# Altium PCB PCB1_r2.PcbDoc (part 1 of 3)
Units mm, origin at the board's own origin, x right, y up, seen from the top; angles counter-clockwise.
Board outline 305 x 172.5 mm, 4 copper layers (Top Layer, GND, VDD, Bottom Layer), stack 1.585 mm thick; 217 components, 137 nets, 764 pads, 352 vias.
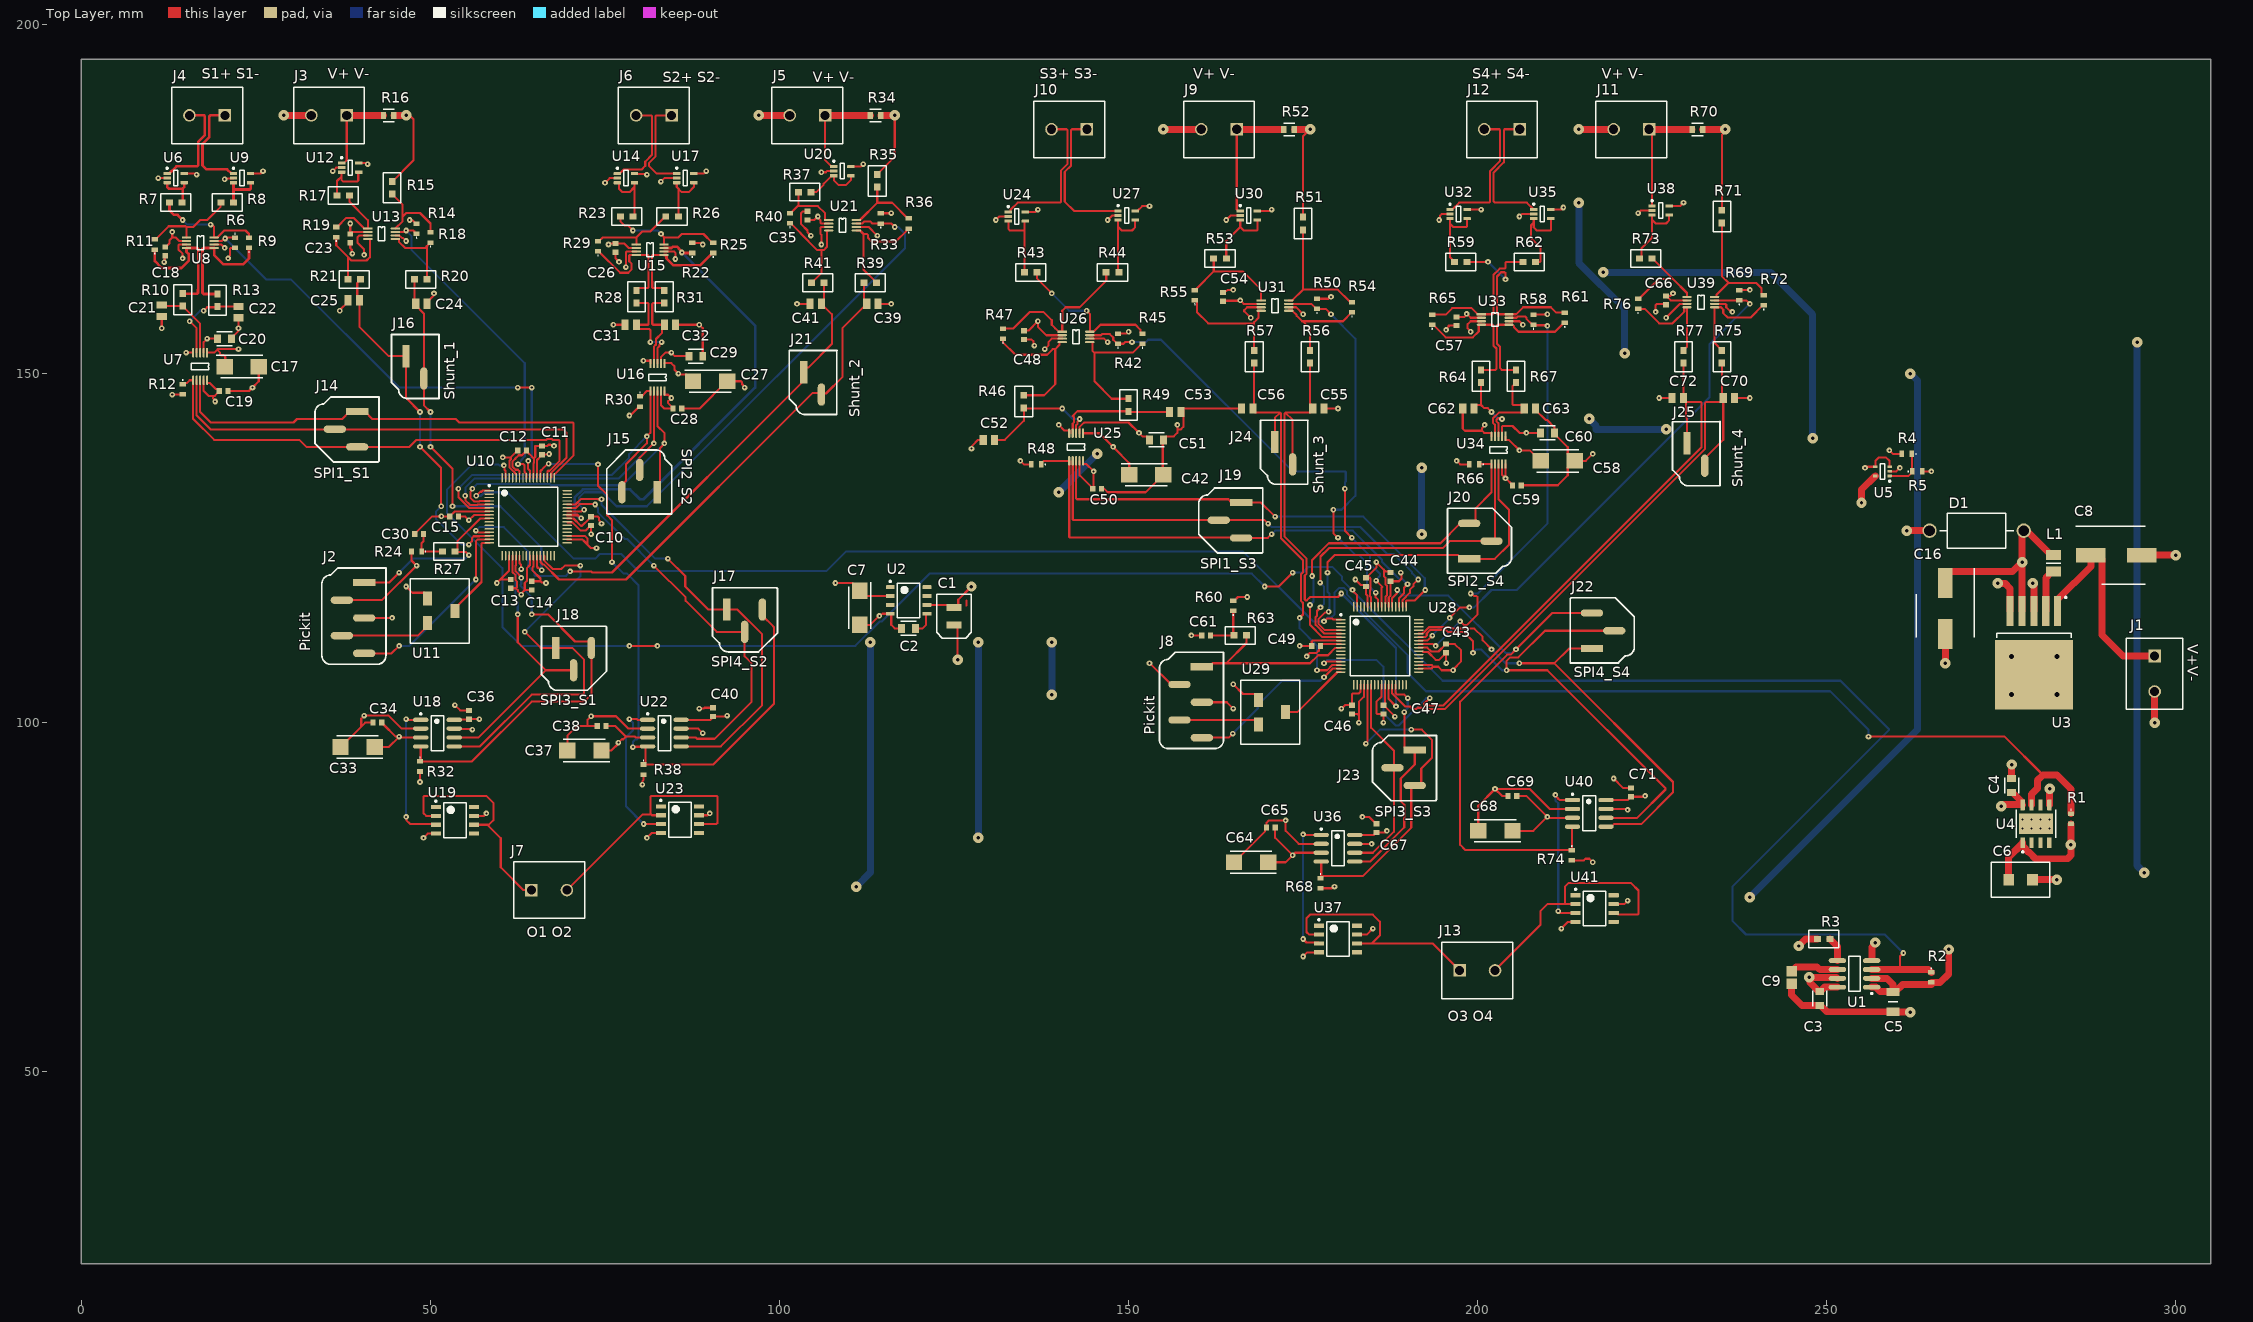
[diagram p0: Top Layer view]
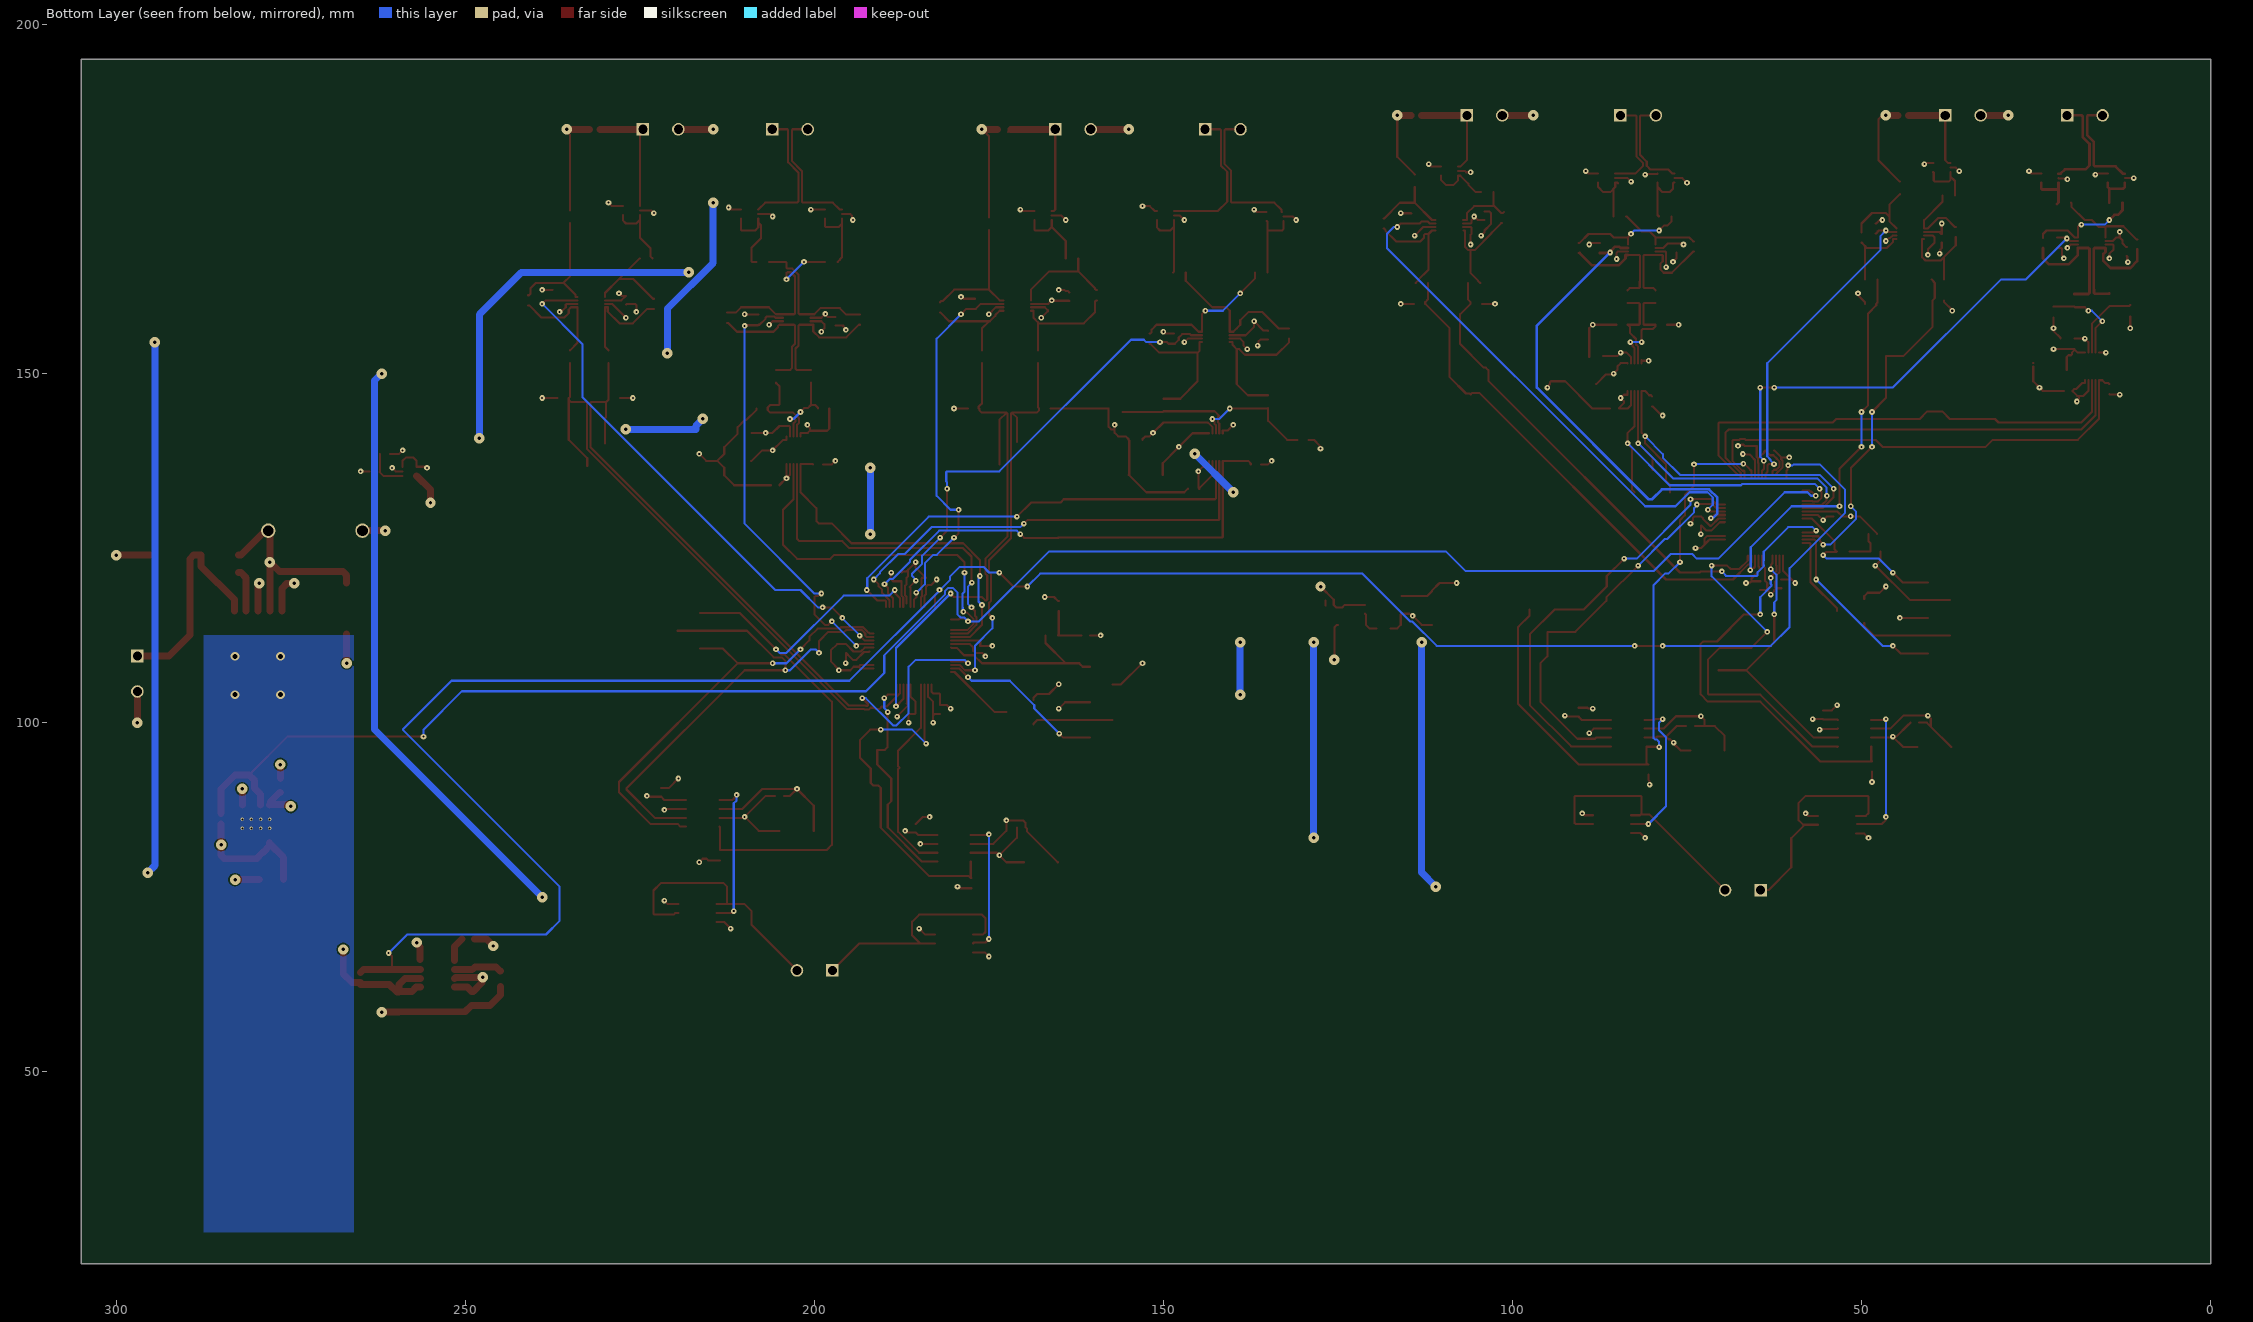
[diagram p1: Bottom Layer view, seen from below]
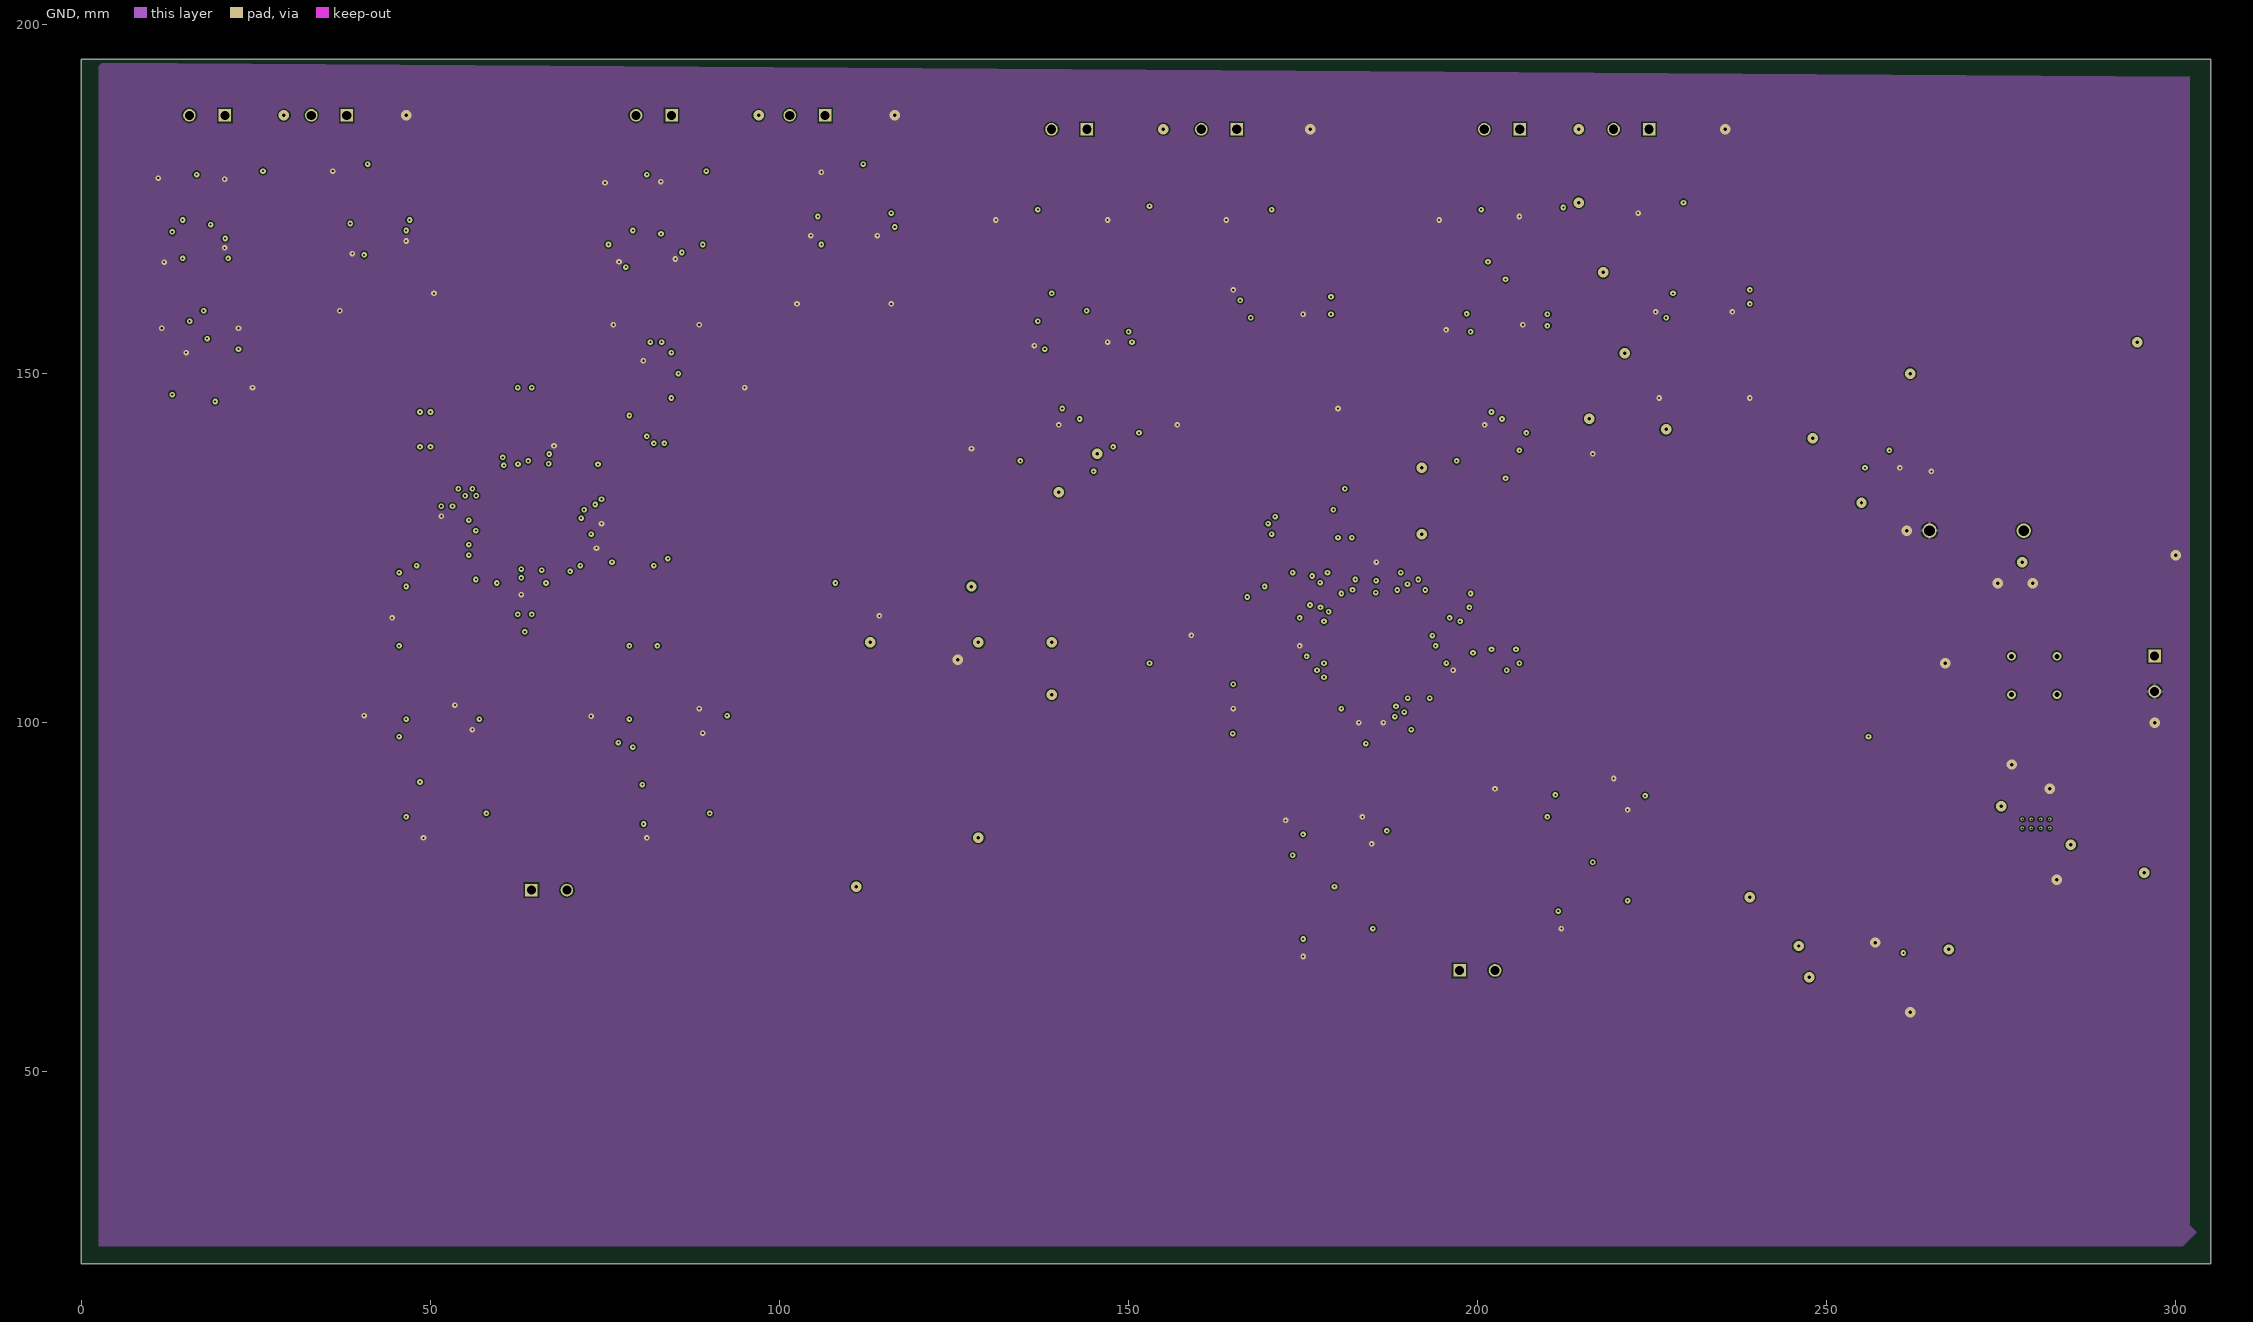
[diagram p2: GND]
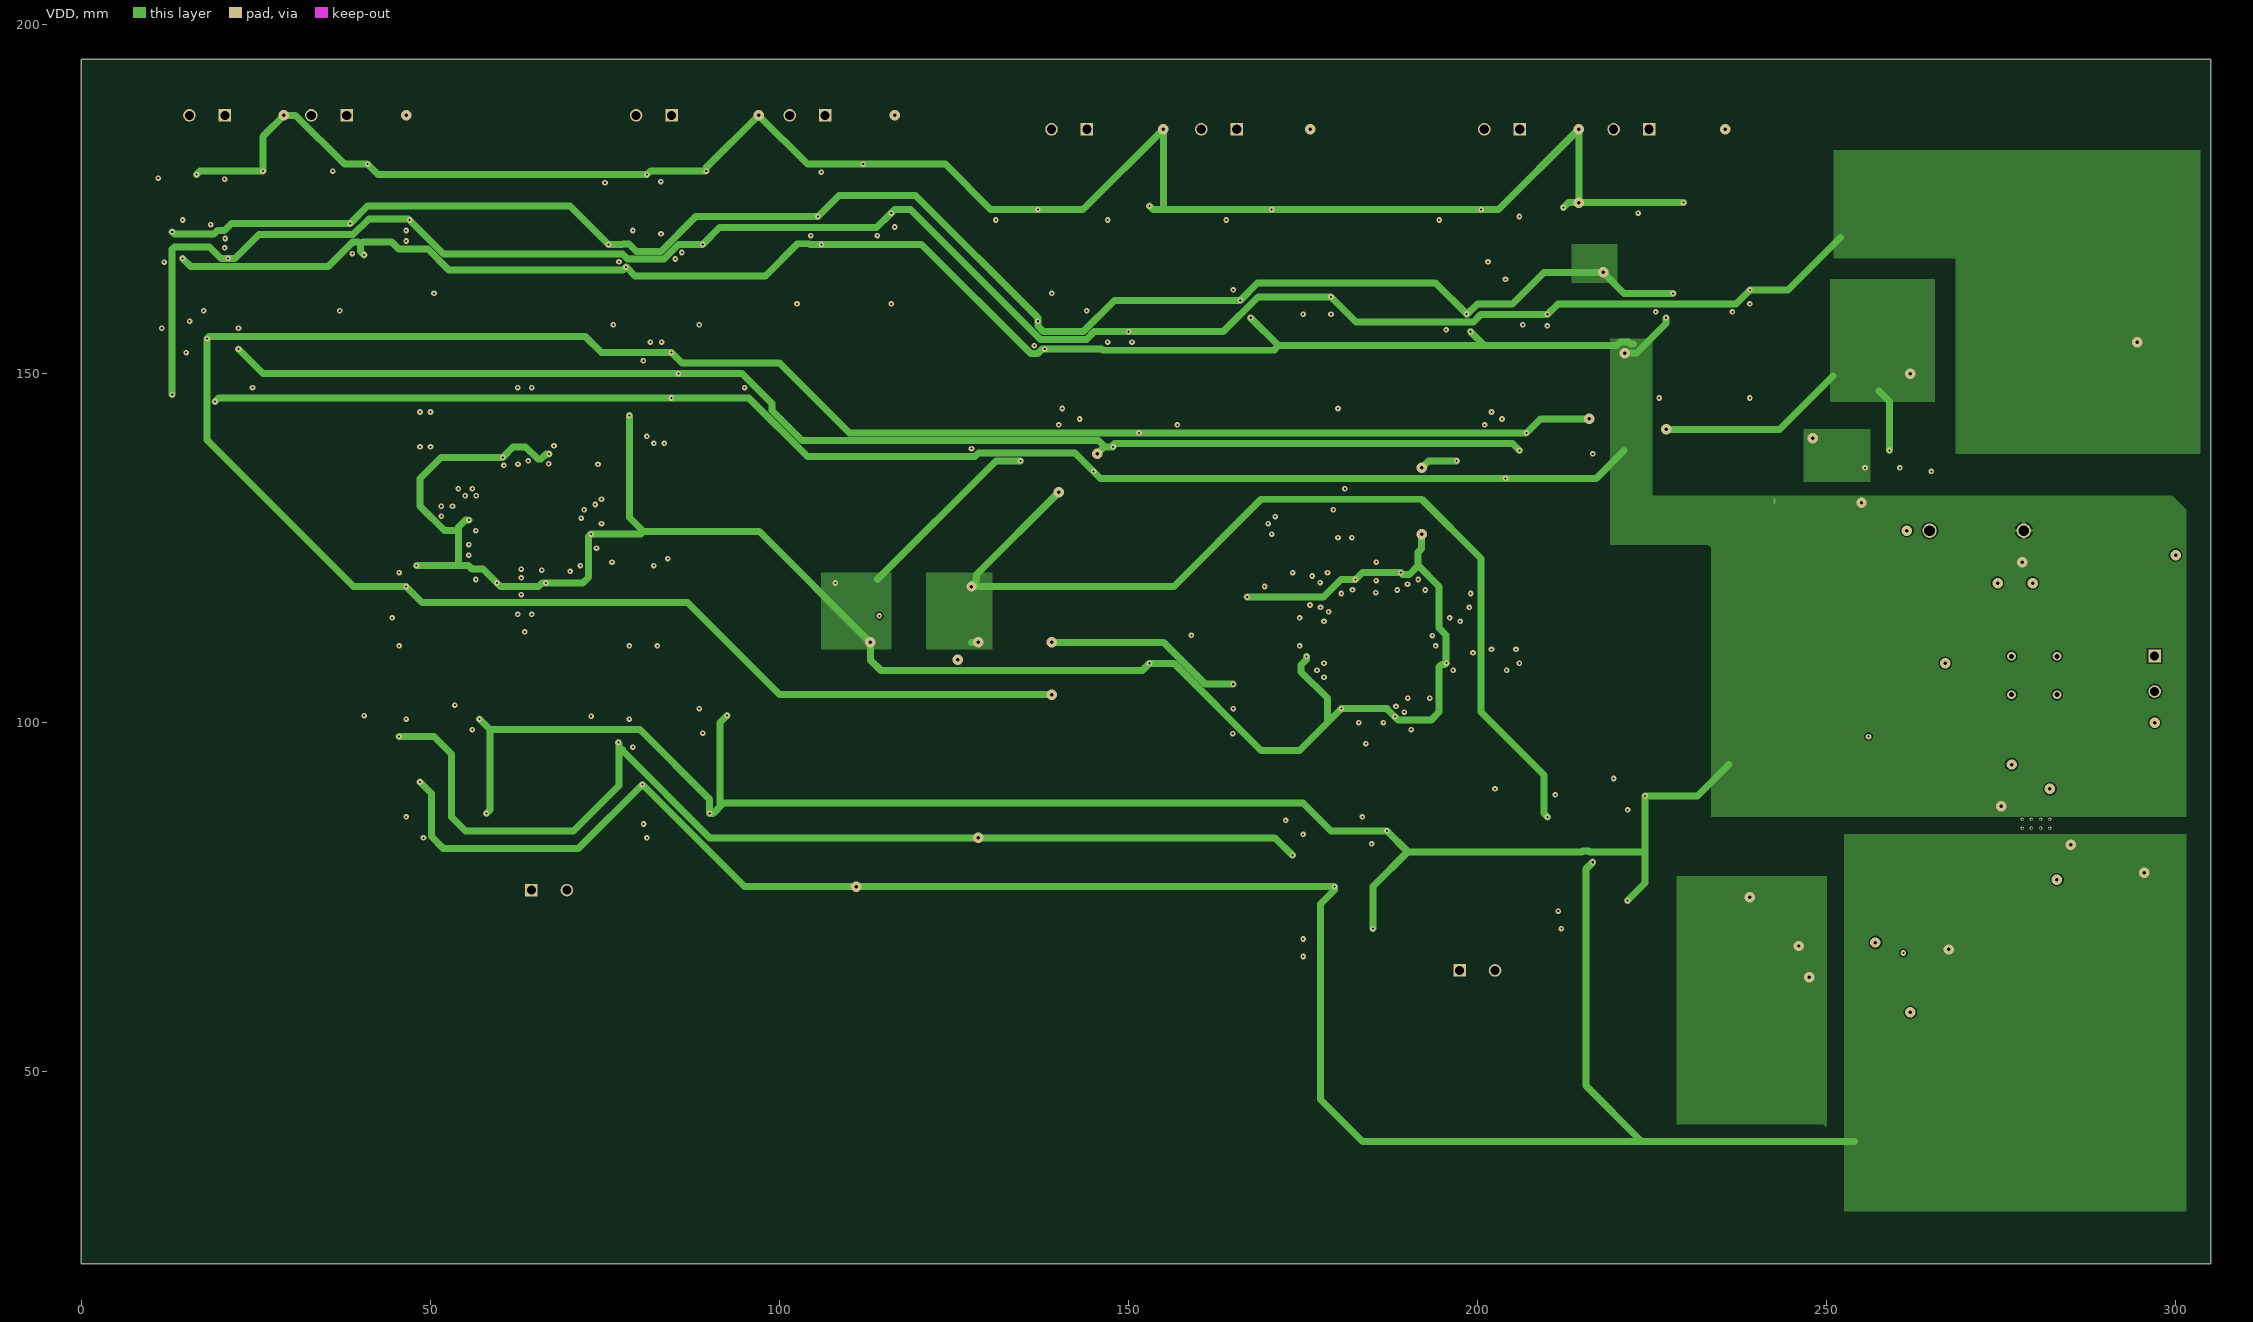
[diagram p3: VDD]

## Layer stack, top to bottom
Top Solder: solder mask 0.0102, Solder Resist, Dk 3.5
Top Layer: signal copper 0.035
Dielectric 2: prepreg 0.21, PP-006, Dk 4.1
GND: signal copper 0.0152
Dielectric 1: dielectric 1.065, FR-4, Dk 4.8
VDD: signal copper 0.0152
Dielectric 3: prepreg 0.21, PP-006, Dk 4.1
Bottom Layer: signal copper 0.035
Bottom Solder: solder mask 0.0102, Solder Resist, Dk 3.5

## Board outline
0,22.5 0,195 305,195 305,22.5

## Design rules (kind name [scope] priority, off if disabled: settings)
BoardOutlineClearance [All] p1: gap=0.3 ignorepadtopadclearanceinfootprint=FALSE except(0.4: Arc-SplitBarrior Arc-SplitContinuation Track-SplitBarrior Track-SplitContinuation SMDPad-SplitBarrior SMDPad-SplitContinuation THPad-SplitBarrior THPad-SplitContinuation Via-SplitBarrior Via-SplitContinuation Fill-SplitBarrior Fill-SplitContinuation Poly-SplitBarrior Poly-SplitContinuation Region-SplitBarrior Region-SplitContinuation Text-SplitBarrior Text-SplitContinuation)
Clearance "Clearance Different Nets" [All] p1: gap=0.2 ignorepadtopadclearanceinfootprint=TRUE except(0.089: Arc-Arc Arc-Track Arc-SMDPad Track-Track Track-SMDPad; 0.127: SMDPad-SMDPad SMDPad-Via THPad-Via Via-Via; 0.254: Arc-Via Arc-Text Track-Via Track-Text SMDPad-Text THPad-Text Via-Text Fill-Text Poly-Text Region-Text Text-Text; 0.5: THPad-THPad Via-Hole)
Clearance "Clearance Same Nets" [All] p2: gap=0.2 ignorepadtopadclearanceinfootprint=TRUE except(0.089: Arc-Arc Arc-Track Arc-SMDPad Track-Track Track-SMDPad SMDPad-SMDPad; 0.127: SMDPad-Via THPad-Via; 0.254: Arc-Via Arc-Text Track-Via Track-Text SMDPad-Text THPad-Text Via-Via Via-Text Fill-Text Poly-Text Region-Text Text-Text)
Clearance "Clearance Bottom Layer" [OnLayer('Bottom Layer')] p3: gap=0.203 ignorepadtopadclearanceinfootprint=TRUE except(0.254: Arc-Text Track-Text SMDPad-Text THPad-Text Via-Text Fill-Text Poly-Text Region-Text Text-Text)
Clearance "Clearance Top Layer" [OnLayer('Top Layer')] p4: gap=0.203 ignorepadtopadclearanceinfootprint=TRUE except(0.254: Arc-Text Track-Text SMDPad-Text THPad-Text Via-Text Fill-Text Poly-Text Region-Text Text-Text)
DiffPairsRouting [All] p1: maxlimit=0.254 minlimit=0.2 mostfreqgap=0.22 toplayer_minwidth=0.2 toplayer_maxwidth=0.381 toplayer_prefwidth=0.3 midlayer1_minwidth=0.2 midlayer1_maxwidth=0.381 midlayer1_prefwidth=0.3 midlayer2_minwidth=0.2 midlayer2_maxwidth=0.381 midlayer2_prefwidth=0.3 bottomlayer_minwidth=0.2 bottomlayer_maxwidth=0.381 bottomlayer_prefwidth=0.3 maxuncoupledlength=12.7
HoleSize [All] p1: absolutevalues=TRUE maxlimit=6.3 minlimit=0.2 maxpercent=80.000 minpercent=20.000
MinimumAnnularRing [All] p1: minimumring=0.13
MinimumSolderMaskSliver [All] p1: minsoldermaskwidth=0.1
PolygonConnect PolygonConnect_1 [All] p1: thpad.connectstyle=Relief thpad.reliefconductorwidth=0.508 thpad.reliefentries=4 thpad.polygonreliefangle="90 Angle" thpad.airgapwidth=0.254 smdpad.connectstyle=Relief smdpad.reliefconductorwidth=0.508 smdpad.reliefentries=4 smdpad.polygonreliefangle="90 Angle" smdpad.airgapwidth=0.254 via.connectstyle=Direct via.reliefconductorwidth=0.508 via.reliefentries=4 via.polygonreliefangle="90 Angle" via.airgapwidth=0.254
RoutingCorners [All] p1: cornerstyle=Round minsetback=2.54 maxsetback=2.54
RoutingVias [All] p1: holewidth=0.5 width=1 viastyle="Through Hole" minholewidth=0.2 minwidth=0.35 maxholewidth=1 maxwidth=2
SilkToSilkClearance [All] p1: silktosilkclearance=0.1
SilkToSolderMaskClearance [IsPad] p1: minsilkscreentomaskgap=0.1 clearancetoexposedcopper=TRUE
SolderMaskExpansion [All] p1: expansion=0.102 istentingtop=FALSE
ViasUnderSMD [All] p1: allowed=TRUE
Width [All] p1: maxlimit=2.54 minlimit=0.089 preferedwidth=0.3
24 further rules are at their usual default settings.

## Classes and differential pairs
component class Thermal: U3 U4
differential pair Vshunt_S4: +Vshunt_S4_P -Vshunt_S4_N
differential pair Vshunt_S3: +Vshunt_S3_P -Vshunt_S3_N
differential pair Vshunt_S2: +Vshunt_S2_P -Vshunt_S2_N
differential pair Vshunt_S1: +Vshunt_S1_P -Vshunt_S1_N
differential pair S4: +S4_P -S4_N
differential pair S4_DRIVERO: +S4_DRIVERO_P -S4_DRIVERO_N
differential pair S4_DRIVERIN: +S4_DRIVERIN_P -S4_DRIVERIN_N
differential pair S4_BUFFO: +S4_BUFFO_P -S4_BUFFO_N
differential pair S4_AIN: +S4_AIN_P -S4_AIN_N
differential pair S3: +S3_P -S3_N
differential pair S3_DRIVERO: +S3_DRIVERO_P -S3_DRIVERO_N
differential pair S3_DRIVERIN: +S3_DRIVERIN_P -S3_DRIVERIN_N
differential pair S3_BUFFO: +S3_BUFFO_P -S3_BUFFO_N
differential pair S3_AIN: +S3_AIN_P -S3_AIN_N
differential pair S2: +S2_P -S2_N
differential pair S2_DRIVERO: +S2_DRIVERO_P -S2_DRIVERO_N
differential pair S2_DRIVERIN: +S2_DRIVERIN_P -S2_DRIVERIN_N
differential pair S2_BUFFO: +S2_BUFFO_P -S2_BUFFO_N
differential pair S2_AIN: +S2_AIN_P -S2_AIN_N
differential pair S1: +S1_P -S1_N
differential pair S1_DRIVERO: +S1_DRIVERO_P -S1_DRIVERO_N
differential pair S1_DRIVERIN: +S1_DRIVERIN_P -S1_DRIVERIN_N
differential pair S1_BUFFO: +S1_BUFFO_P -S1_BUFFO_N
differential pair S1_AIN: +S1_AIN_P -S1_AIN_N

## Components (designator, comment, footprint, x,y, rotation, side; value= is the part's Value field where it differs from the comment)
C1 "33 uF" TANT_33UF 125,115.25 r270 top
C2 "1 uF" FP-0805-L_2_01_0_2-W_1_25-MFG 118.5,113.5 r180 top
C3 "1 uF" FP-0805-L_2_01_0_2-W_1_25-MFG 249,60.5 r270 top
C4 "1 uF" FP-0805-L_2_01_0_2-W_1_25-MFG 276.5,91 r90 top
C5 "4.7 uF" C_1206 259.5,60 r90 top
C6 "10 uF" CERAMIC_1206 277.79,77.5 r180 top
C7 "10 uF" CAPPM6032X280N 111.5,116.45 r270 top
C8 "100 uF" CAPAE830X1050N 291.5,124 r0 top
C9 "1000 pF" CAPC2013X140X50ML20T25 245,63.5 r90 top
C10 "0.1 uF" CAPC1608X90X35LL10T15 73,128.875 r270 top
C11 "0.1 uF" CAPC1608X90X35LL10T15 66,139 r270 top
C12 "0.1 uF" CAPC1608X90X35LL10T15 63.125,139 r180 top
C13 "0.1 uF" CAPC1608X90X35LL10T15 61.5,119.875 r90 top
C14 "0.1 uF" CAPC1608X90X35LL10T15 64.5,119.625 r90 top
C15 "0.1 uF" CAPC1608X90X35LL10T15 53.375,129.5 r0 top
C16 "220 uF" CAPAE830X1050N 267,116.35 r270 top
C17 "10 uF" CAPPM6032X280N 22.95,151 r0 top
C18 "0.1 uF" CAPC1608X90X35LL10T15 12,167.5 r270 top
C19 "0.1 uF" CAPC1608X90X35LL10T15 20.375,147.5 r180 top
C20 "1 uF" FP-0805-L_2_01_0_2-W_1_25-MFG 20.5,155 r0 top
C21 "2 nF" C_0805 11.5,159 r90 top
C22 "2 nF" C_0805 22.5,158.81 r90 top
C23 "0.1 uF" CAPC1608X90X35LL10T15 38.5,169.375 r270 top
C24 "2 nF" C_0805 48.69,160 r180 top
C25 "2 nF" C_0805 39,160.5 r0 top
C26 "0.1 uF" CAPC1608X90X35LL10T15 76.5,168 r270 top
C27 "10 uF" CAPPM6032X280N 90.052,148.9 r0 top
C28 "0.1 uF" CAPC1608X90X35LL10T15 85.375,145 r180 top
C29 "1 uF" FP-0805-L_2_01_0_2-W_1_25-MFG 88,152.5 r0 top
C30 "0.1 uF" CAPC1608X90X35LL10T15 48.375,127 r0 top
C31 "2 nF" C_0805 78.69,157 r0 top
C32 "2 nF" C_0805 84.31,157 r180 top
C33 "10 uF" CAPPM6032X280N 39.55,96.5 r180 top
C34 "0.1 uF" CAPC1608X90X35LL10T15 42.375,100 r180 top
C35 "0.1 uF" CAPC1608X90X35LL10T15 104,172.625 r90 top
C36 "0.1 uF" CAPC1608X90X35LL10T15 55.5,101.125 r90 top
C37 "10 uF" CAPPM6032X280N 72.05,96 r180 top
C38 "0.1 uF" CAPC1608X90X35LL10T15 74.5,99.5 r180 top
C39 "2 nF" C_0805 113.31,160 r180 top
C40 "0.1 uF" CAPC1608X90X35LL10T15 90.5,101.5 r90 top
C41 "2 nF" C_0805 105.19,160 r0 top
C42 "10 uF" CAPPM6032X280N 152.55,135.5 r0 top
C43 "0.1 uF" CAPC1608X90X35LL10T15 195.5,110.625 r270 top
C44 "0.1 uF" CAPC1608X90X35LL10T15 187.5,120.875 r270 top
C45 "0.1 uF" CAPC1608X90X35LL10T15 184,120.125 r270 top
C46 "0.1 uF" CAPC1608X90X35LL10T15 182,101.875 r90 top
C47 "0.1 uF" CAPC1608X90X35LL10T15 186.5,101.875 r90 top
C48 "0.1 uF" CAPC1608X90X35LL10T15 135,155.5 r270 top
C49 "0.1 uF" CAPC1608X90X35LL10T15 176.875,111 r0 top
C50 "0.1 uF" CAPC1608X90X35LL10T15 145.5,133.5 r180 top
C51 "1 uF" FP-0805-L_2_01_0_2-W_1_25-MFG 154,140.5 r0 top
C52 "2 nF" C_0805 130,140.5 r0 top
C53 "2 nF" C_0805 156.69,144.5 r180 top
C54 "0.1 uF" CAPC1608X90X35LL10T15 163.5,161 r90 top
C55 "2 nF" C_0805 177.19,145 r180 top
C56 "2 nF" C_0805 167,145 r0 top
C57 "0.1 uF" CAPC1608X90X35LL10T15 197,157.5 r270 top
C58 "10 uF" CAPPM6032X280N 211.5,137.5 r0 top
C59 "0.1 uF" CAPC1608X90X35LL10T15 205.625,134 r180 top
C60 "1 uF" FP-0805-L_2_01_0_2-W_1_25-MFG 210,141.5 r0 top
C61 "0.1 uF" CAPC1608X90X35LL10T15 161.125,112.5 r0 top
C62 "2 nF" C_0805 198.69,145 r0 top
C63 "2 nF" C_0805 207.5,145 r180 top
C64 "10 uF" CAPPM6032X280N 167.55,80 r180 top
C65 "0.1 uF" CAPC1608X90X35LL10T15 170.375,85 r180 top
C66 "0.1 uF" CAPC1608X90X35LL10T15 227,160.5 r270 top
C67 "0.1 uF" CAPC1608X90X35LL10T15 185.5,84.875 r90 top
C68 "10 uF" CAPPM6032X280N 202.55,84.5 r180 top
C69 "0.1 uF" CAPC1608X90X35LL10T15 205,89.5 r180 top
C70 "2 nF" C_0805 236,146.5 r180 top
C71 "0.1 uF" CAPC1608X90X35LL10T15 222,90 r90 top
C72 "2 nF" C_0805 228.69,146.5 r0 top
D1 "MBR360RLG" ONSC-AXIAL_LEAD-2-267-05_V 271.5,127.5 r180 top
J1 "Board_Supply" PHOE-1729128-2_V 297,107 r270 top
J2 "PICKIT5" BREAKOUT_CON 40.5,120.08 r270 top
J3 "Sensor1_Supply" PHOE-1729128-2_V 35.46,187 r180 top
J4 "Senso1_output" PHOE-1729128-2_V 18,187 r180 top
J5 "Sensor2_Supply" PHOE-1729128-2_V 104,187 r180 top
J6 "Sensor2_output" PHOE-1729128-2_V 82,187 r180 top
J7 "Module1_out" PHOE-1729128-2_V 67,76 r0 top
J8 "PICKIT5" BREAKOUT_CON 160.5,108 r270 top
J9 "Sensor3_Supply" PHOE-1729128-2_V 162.96,185 r180 top
J10 "Senso3_output" PHOE-1729128-2_V 141.5,185 r180 top
J11 "Sensor4_Supply" PHOE-1729128-2_V 222.04,185 r180 top
J12 "Sensor4_output" PHOE-1729128-2_V 203.5,185 r180 top
J13 "Module2_out" PHOE-1729128-2_V 199.96,64.5 r0 top
J14 "Breakout3" BREAKOUT_CON3PIN 39.5,144.58 r270 top
J15 "Breakout3" BREAKOUT_CON3PIN 82.5,133 r180 top
J16 "Breakout2" Breakout_con2pin 46.5,152.5 r0 top
J17 "Breakout3" BREAKOUT_CON3PIN 92.46,116.2 r0 top
J18 "Breakout3" BREAKOUT_CON3PIN 67.96,110.7 r0 top
J19 "Breakout3" BREAKOUT_CON3PIN 166.122,131.54 r270 top
J20 "Breakout3" BREAKOUT_CON3PIN 198.8,123.46 r90 top
J21 "Breakout2" Breakout_con2pin 103.46,150.2 r0 top
J22 "Breakout3" BREAKOUT_CON3PIN 216.384,110.625 r90 top
J23 "Breakout3" BREAKOUT_CON3PIN 191,96.08 r270 top
J24 "Breakout2" Breakout_con2pin 170.96,140.2 r0 top
J25 "Breakout2" Breakout_con2pin 230,140 r0 top
L1 "330 uH" FP-CB2518-IPC_A 282.5,122.824 r90 top
R1 "Resistor_4.7K_PU" RES_0603 285,86.225 r270 top
R2 "Resistor_4.7K_PU" RES_0603 265,63.5 r270 top
R3 "Resistor_100K_reg" R_0603 249.6,69 r180 top
R4 "Resistor_4.3K_reg" RES_0603 261.5,138.5 r180 top
R5 "Resistor_5.6K_reg" RES_0603 263,136 r0 top
R6 "Resistor_4.7K_PU" RES_0603 22,168.725 r270 top
R7 "Resistor_1K_signal" R_0603 13.5,174.5 r180 top
R8 "Resistor_1K_signal" R_0603 20.9,174.5 r180 top
R9 "Resistor_10K_sig" RES_0603 24,168.725 r90 top
R10 "Resistor_1K_signal" R_0603 14.5,160.6 r270 top
R11 "Resistor_10K_sig" RES_0603 10.5,168.5 r90 top
R12 "Resistor_4.7K_PU" RES_0603 14.5,147.775 r270 top
R13 "Resistor_1K_signal" R_0603 19.5,160.5 r270 top
R14 "Resistor_4.7K_PU" RES_0603 48,170.775 r90 top
R15 "Resistor_1K_signal" R_0603 44.5,176.6 r270 top
R16 "200 ohm" FP-CRCW0603-e3-MFG 44,187 r180 top
R17 "Resistor_1K_signal" R_0603 37.5,175.5 r0 top
R18 "Resistor_10K_sig" RES_0603 50,169.5 r90 top
R19 "Resistor_10K_sig" RES_0603 36.5,170.275 r90 top
R20 "Resistor_1K_signal" R_0603 48.6,163.5 r180 top
R21 "Resistor_1K_signal" R_0603 39.1,163.5 r0 top
R22 "Resistor_4.7K_PU" RES_0603 87.5,168 r90 top
R23 "Resistor_1K_signal" R_0603 78.1,172.5 r180 top
R24 "Resistor_10K_sig" RES_0603 48,124.5 r180 top
R25 "Resistor_10K_sig" RES_0603 90.5,168 r90 top
R26 "Resistor_1K_signal" R_0603 84.6,172.5 r180 top
R27 "Resistor_1K_signal" R_0603 52.6,124.5 r0 top
R28 "Resistor_1K_signal" R_0603 79.5,161 r270 top
R29 "Resistor_10K_sig" RES_0603 74,168.225 r90 top
R30 "Resistor_4.7K_PU" RES_0603 80,146 r270 top
R31 "Resistor_1K_signal" R_0603 83.5,161 r270 top
R32 "Resistor_4.7K_PU" RES_0603 48.5,93.725 r270 top
R33 "Resistor_4.7K_PU" RES_0603 114.5,172.225 r90 top
R34 "200 ohm" FP-CRCW0603-e3-MFG 113.75,187 r180 top
R35 "Resistor_1K_signal" R_0603 114,177.6 r270 top
R36 "Resistor_10K_sig" RES_0603 118.5,171.5 r90 top
R37 "Resistor_1K_signal" R_0603 103.6,176 r180 top
R38 "Resistor_4.7K_PU" RES_0603 80.5,93.275 r270 top
R39 "Resistor_1K_signal" R_0603 113,163 r180 top
R40 "Resistor_10K_sig" RES_0603 101.5,172.275 r90 top
R41 "Resistor_1K_signal" R_0603 105.5,163 r0 top
R42 "Resistor_4.7K_PU" RES_0603 148.5,155 r90 top
R43 "Resistor_1K_signal" R_0603 136,164.5 r0 top
R44 "Resistor_1K_signal" R_0603 147.7,164.5 r180 top
R45 "Resistor_10K_sig" RES_0603 152,155 r90 top
R46 "Resistor_1K_signal" R_0603 135,146 r270 top
R47 "Resistor_10K_sig" RES_0603 132,155.725 r90 top
R48 "Resistor_4.7K_PU" RES_0603 136.775,137 r180 top
R49 "Resistor_1K_signal" R_0603 150,145.5 r270 top
R50 "Resistor_4.7K_PU" RES_0603 177,160 r90 top
R51 "Resistor_1K_signal" R_0603 175,171.5 r270 top
R52 "200 ohm" FP-CRCW0603-e3-MFG 173,185 r180 top
R53 "Resistor_1K_signal" R_0603 163.1,166.5 r180 top
R54 "Resistor_10K_sig" RES_0603 182,159.5 r90 top
R55 "Resistor_10K_sig" RES_0603 159.5,161.225 r90 top
R56 "Resistor_1K_signal" R_0603 176,152.4 r270 top
R57 "Resistor_1K_signal" R_0603 168,152.4 r270 top
R58 "Resistor_4.7K_PU" RES_0603 208,157.725 r90 top
R59 "Resistor_1K_signal" R_0603 197.6,166 r0 top
R60 "Resistor_10K_sig" RES_0603 165,116.725 r90 top
R61 "Resistor_10K_sig" RES_0603 212.5,158 r90 top
R62 "Resistor_1K_signal" R_0603 207.4,166 r180 top
R63 "Resistor_1K_signal" R_0603 166,112.5 r0 top
R64 "Resistor_1K_signal" R_0603 200.5,149.6 r270 top
R65 "Resistor_10K_sig" RES_0603 193.5,157.725 r90 top
R66 "Resistor_4.7K_PU" RES_0603 199.5,137 r180 top
R67 "Resistor_1K_signal" R_0603 205.5,149.6 r270 top
R68 "Resistor_4.7K_PU" RES_0603 177.5,77 r270 top
R69 "Resistor_4.7K_PU" RES_0603 237.5,161.225 r90 top
R70 "200 ohm" FP-CRCW0603-e3-MFG 231.5,185 r180 top
R71 "Resistor_1K_signal" R_0603 235,172.5 r270 top
R72 "Resistor_10K_sig" RES_0603 241,160.5 r90 top
R73 "Resistor_1K_signal" R_0603 224.1,166.5 r0 top
R74 "Resistor_4.7K_PU" RES_0603 213.5,81 r270 top
R75 "Resistor_1K_signal" R_0603 235,152.4 r270 top
R76 "Resistor_10K_sig" RES_0603 223,160 r90 top
R77 "Resistor_1K_signal" R_0603 229.5,152.4 r270 top
U1 "MCP1725-1802E/SN" SOIC-SN8_M 254,64 r180 top
U2 "REF5025AIDR" D0008A_L 118.5,117.5 r0 top
U3 "LM2575-5.0WU" FP-TO263-5LD-PL-1-MFG 279.7,108.21 r180 top
U4 "TPS7B8633QDDARQ1" FP-DDA0008B-MFG 280,85.5 r90 top locked
U5 "OPA349SA/3K" DCK0005A_L 258,136 r180 top
U6 "OPA377AIDCKR" DCK0005A_M 13.5,178 r0 top
U7 "MCP33131D-10T-I/MS" MSOP10 18,153 r270 top
U8 "MCP6D11T-E/MS" MSOP8 15.05,169.5 r0 top
U9 "OPA377AIDCKR" DCK0005A_M 23,178 r0 top
U10 "PIC32MZ2048EFG064-I/PT" FP-C04-085-PT-IPC_C 64,129.5 r0 top
U11 "Switch" SWITCH 49.6,116 r270 top
U12 "OPA377AIDCKR" DCK0005A_M 38.5,179.5 r0 top
U13 "MCP6D11T-E/MS" MSOP8 41.021,170.779 r0 top
U14 "OPA377AIDCKR" DCK0005A_M 78,178 r0 top
U15 "MCP6D11T-E/MS" MSOP8 79.5,168.5 r0 top
U16 "MCP33131D-10T-I/MS" MSOP10 83.5,151.45 r270 top
U17 "OPA377AIDCKR" DCK0005A_M 86.5,178 r0 top
U18 "DAC8830ICD" TI-D8_N 51,98.5 r0 top
U19 "OPA704UA" D0008A_N 53.5,86 r0 top
U20 "OPA377AIDCKR" DCK0005A_M 109,179 r0 top
U21 "MCP6D11T-E/MS" MSOP8 107.05,172 r0 top
U22 "DAC8830ICD" TI-D8_N 83.5,98.5 r0 top
U23 "OPA704UA" D0008A_N 85.725,86.095 r0 top
U24 "OPA377AIDCKR" DCK0005A_M 134,172.5 r0 top
U25 "MCP33131D-10T-I/MS" MSOP10 143.5,141.45 r270 top
U26 "MCP6D11T-E/MS" MSOP8 140.5,156 r0 top
U27 "OPA377AIDCKR" DCK0005A_M 149.725,172.65 r0 top
U28 "PIC32MZ2048EFG064-I/PT" FP-C04-085-PT-IPC_C 186,111 r0 top
U29 "Switch" SWITCH 168.6,101.5 r270 top
U30 "OPA377AIDCKR" DCK0005A_M 167.225,172.65 r0 top
U31 "MCP6D11T-E/MS" MSOP8 169,160.5 r0 top
U32 "OPA377AIDCKR" DCK0005A_M 197.275,172.85 r0 top
U33 "MCP6D11T-E/MS" MSOP8 200.55,158.5 r0 top
U34 "MCP33131D-10T-I/MS" MSOP10 204,141 r270 top
U35 "OPA377AIDCKR" DCK0005A_M 209.275,172.85 r0 top
U36 "DAC8830ICD" TI-D8_N 180,82 r0 top
U37 "OPA704UA" D0008A_N 180,69 r0 top
U38 "OPA377AIDCKR" DCK0005A_M 226.225,173.35 r0 top
U39 "MCP6D11T-E/MS" MSOP8 230,161 r0 top
U40 "DAC8830ICD" TI-D8_N 216,87 r0 top
U41 "OPA704UA" D0008A_N 216.775,73.365 r0 top

## Footprints (in the part's own frame and the unit in brackets; to place one, negate y for a bottom-side part, rotate by r counter-clockwise, add the part's x,y. Pads: shape width x height; smd on the part's side, far side on the other; paste and mask are expansions set on the pad)
BREAKOUT_CON [mm]
  rect 1.05x3.2 smd: 1(0,0)
  oval 1.05x3.2 smd: 2(2.54,-3.2) 3(5.08,0) 4(7.62,-3.2) 5(10.16,0)
  silkscreen extent -2.07,-6.06 11.72,3.12
Breakout_con2pin [mm]
  rect 1.05x3.2 smd: 1(0,0)
  oval 1.05x3.2 smd: 2(2.54,-3.2)
  silkscreen extent -2.07,-6.06 4.76,3.13
BREAKOUT_CON3PIN [mm]
  rect 1.05x3.2 smd: 1(0,0)
  oval 1.05x3.2 smd: 2(2.54,-3.2) 3(5.08,0)
  silkscreen extent -2.07,-6.06 7.26,3.12
C_0805 [mm] "CAPC2012X140N Ceramic 0805"
  rect 1.02x1.47 smd: 1(-0.81,0) 2(0.81,0)
C_1206 [mm] "CAPC3316X180N AVE 1206"
  rect 1.17x1.82 smd: 1(-1.42,0) 2(1.42,0)
  silkscreen extent 0,-0.7 0,0.7
CAPAE830X1050N [mm] "tantalum"
  rect 4.25x2.1 smd: 1(-3.65,0) 2(3.65,0)
  silkscreen extent -5.77,-4.15 4.15,4.15
CAPC1608X90X35LL10T15 [mm] "Chip Capacitor, 2-Leads, Body 1.60x0.80mm, IPC High Density"
  rect 0.75x0.85 smd: 1(-0.625,0) 2(0.625,0)
  body extent -0.85,-0.45 0.85,0.45, height 0.9
CAPC2013X140X50ML20T25 [mm] "Chip Capacitor, 2-Leads, Body 2.00x1.25mm, IPC Low Density"
  rect 1.5x1.55 smd: 1(-0.9,0) 2(0.9,0)
  body extent -1.1,-0.72 1.1,0.72, height 1.4
CAPPM6032X280N [mm] "10 uF tantalum"
  rect 2.35x2.25 smd: 1(-2.45,0) 2(2.45,0)
  silkscreen extent -3.62,-1.6 3,1.6
CERAMIC_1206 [mm]
  rect 1.52x1.6 smd: 1(-1.71,0) 2(1.71,0)
  silkscreen extent -4.17,-2.5 4.17,2.5
D0008A_L [mm] "SOIC, 8-Leads, Body 5x4mm, Pitch 1.27mm, IPC High Density"
  rrect18% 1.25x0.55 smd: 1(-2.625,1.905) 2(-2.625,0.635) 3(-2.625,-0.635) 4(-2.625,-1.905) 5(2.625,-1.905) 6(2.625,-0.635) 7(2.625,0.635) 8(2.625,1.905)
  silkscreen extent -2.75,-2.5 1.6,2.85, body extent -3,-2.45 3,2.45, height 1.63
D0008A_N [mm] "SOIC, 8-Leads, Body 5x4mm, Pitch 1.27mm, IPC Medium Density"
  rrect17% 1.45x0.6 smd: 1(-2.725,1.905) 2(-2.725,0.635) 3(-2.725,-0.635) 4(-2.725,-1.905) 5(2.725,-1.905) 6(2.725,-0.635) 7(2.725,0.635) 8(2.725,1.905)
  silkscreen extent -2.85,-2.5 1.6,2.88, body extent -3,-2.45 3,2.45, height 1.63
DCK0005A_L [mm] "SOT23, 5-Leads, Body 2.15x1.4mm, Pitch 0.65mm, IPC High Density"
  rrect25% 0.65x0.4 smd: 1(-1.025,0.65) 2(-1.025,0) 3(-1.025,-0.65) 4(1.025,-0.65) 5(1.025,0.65)
  silkscreen extent -1.15,-1.1 0.3,1.52, body extent -1.14,-1 1.14,1, height 0.94
DCK0005A_M [mm] "SOT23, 5-Leads, Body 2.15x1.4mm, Pitch 0.65mm, IPC Low Density"
  rrect22% 1.05x0.45 smd: 1(-1.225,0.65) 2(-1.225,0) 3(-1.225,-0.65) 4(1.225,-0.65) 5(1.225,0.65)
  silkscreen extent -1.35,-1.1 0.3,1.55, body extent -1.14,-1 1.14,1, height 0.94
FP-0805-L_2_01_0_2-W_1_25-MFG [mm]
  rect 1x1.25 smd paste+0 mask+0: 1(-1,0) 2(1,0)
  silkscreen extent -1.1,-1 1.1,1, body extent -1.6,-0.82 1.6,0.82, height 0.25
FP-C04-085-PT-IPC_C [mm]
  rect 1.355x0.212 smd paste+0 mask+0: 1(-5.575,3.75)
  rrect100% 1.355x0.212 smd paste+0 mask+0: 2(-5.575,3.25) 3(-5.575,2.75) 4(-5.575,2.25) 5(-5.575,1.75) 6(-5.575,1.25) 7(-5.575,0.75) 8(-5.575,0.25) 9(-5.575,-0.25) 10(-5.575,-0.75) 11(-5.575,-1.25) 12(-5.575,-1.75) 13(-5.575,-2.25) 14(-5.575,-2.75) 15(-5.575,-3.25) 16(-5.575,-3.75) 33(5.575,-3.75) 34(5.575,-3.25) 35(5.575,-2.75) 36(5.575,-2.25) 37(5.575,-1.75) 38(5.575,-1.25) 39(5.575,-0.75) 40(5.575,-0.25) 41(5.575,0.25) 42(5.575,0.75) 43(5.575,1.25) 44(5.575,1.75) 45(5.575,2.25) 46(5.575,2.75) 47(5.575,3.25) 48(5.575,3.75)
  rrect100% 0.212x1.355 smd paste+0 mask+0: 17(-3.75,-5.575) 18(-3.25,-5.575) 19(-2.75,-5.575) 20(-2.25,-5.575) 21(-1.75,-5.575) 22(-1.25,-5.575) 23(-0.75,-5.575) 24(-0.25,-5.575) 25(0.25,-5.575) 26(0.75,-5.575) 27(1.25,-5.575) 28(1.75,-5.575) 29(2.25,-5.575) 30(2.75,-5.575) 31(3.25,-5.575) 32(3.75,-5.575) 49(3.75,5.575) 50(3.25,5.575) 51(2.75,5.575) 52(2.25,5.575) 53(1.75,5.575) 54(1.25,5.575) 55(0.75,5.575) 56(0.25,5.575) 57(-0.25,5.575) 58(-0.75,5.575) 59(-1.25,5.575) 60(-1.75,5.575) 61(-2.25,5.575) 62(-2.75,5.575) 63(-3.25,5.575) 64(-3.75,5.575)
  silkscreen extent -5.7,-4.25 4.25,4.58, body extent -6.35,-6.35 6.35,6.35, height 0.25
FP-CB2518-IPC_A [mm]
  rect 1.455x2.106 smd paste+0 mask+0: 1(-1.176,0) 2(1.176,0)
  silkscreen extent 0,-1.05 0,1.05, body extent -2.4,-1.55 2.4,1.55, height 0.25
FP-CRCW0603-e3-MFG [mm]
  rect 0.75x1 smd paste+0 mask+0: 1(-0.75,0) 2(0.75,0)
  silkscreen extent -0.8,-0.9 0.8,0.9, body extent -1.22,-0.6 1.22,0.6, height 0.25
FP-DDA0008B-MFG [mm]
  rrect17% 1.55x0.6 smd paste+0 mask+0: 1(-2.7,1.905) 2(-2.7,0.635) 3(-2.7,-0.635) 4(-2.7,-1.905) 5(2.7,-1.905) 6(2.7,-0.635) 7(2.7,0.635) 8(2.7,1.905)
  rrect3% 2.95x4.9 smd paste-1000 mask-1000: 9(0,0)
  silkscreen extent -4.15,-2.83 2,2.83, body extent -3.57,-2.75 3.57,2.75, height 0.25
FP-TO263-5LD-PL-1-MFG [mm]
  rect 1.02x4.32 smd paste+0 mask+0: 1(-3.4,-7.79) 2(-1.7,-7.79) 3(0,-7.79) 4(1.7,-7.79) 5(3.4,-7.79)
  rect 11.18x9.91 smd paste+0 mask+0: 6(0,1.355)
  silkscreen extent -5.33,-9.86 5.33,-3.98, body extent -5.69,-10.05 5.69,6.41, height 0.25
MSOP8 [mm]
  rect 1.35x0.3 smd: 1(0,0)
  oval 1.35x0.3 smd: 2(0,-0.5) 3(0,-1) 4(0,-1.5) 5(3.95,-1.5) 6(3.95,-1) 7(3.95,-0.5) 8(3.95,0)
  silkscreen extent 1.51,-1.75 2.44,0.25
MSOP10 [mm]
  rect 1.35x0.3 smd: 1(0,0)
  oval 1.35x0.3 smd: 2(0,-0.5) 3(0,-1) 4(0,-1.5) 5(0,-2) 6(3.95,-2) 7(3.95,-1.5) 8(3.95,-1) 9(3.95,-0.5) 10(3.95,0)
  silkscreen extent 1.51,-2.25 2.44,0.25
ONSC-AXIAL_LEAD-2-267-05_V [mm] "AXIAL, 2-Leads, Diameter 5.05mm"
  round 2.05 hole 1.55: 1(-6.745,0) 2(6.745,0)
  silkscreen extent -5.32,-2.52 5.32,2.52
PHOE-1729128-2_V [mm] "Receptacle, 2-Leads, Body 8.1x10.16mm, Pitch 5.08mm"
  rect 1.8x1.8 hole 1.3: 1(-2.54,0)
  round 1.8 hole 1.3: 2(2.54,0)
  silkscreen extent -5.08,-4.05 5.08,4.05, body extent -5.65,-4.05 5.08,4.05, height 10.01
R_0603 [mm]
  rect 1x0.9 smd: 1(-0.9,0) 2(0.9,0)
  silkscreen extent -2.16,-1.27 2.16,1.27
RES_0603 [mm] "ERA3AEB101V Panasonic 0603"
  rect 0.65x0.9 smd: 1(-0.725,0) 2(0.725,0)
  silkscreen extent -1.35,-0.05 -1.25,0.05
SOIC-SN8_M [mm] "SOIC, 8-Leads, Body 4.9x3.9mm, Pitch 1.27mm, IPC Low Density"
  oval 2.5x0.7 smd: 1(-2.45,1.905) 2(-2.45,0.635) 3(-2.45,-0.635) 4(-2.45,-1.905) 5(2.45,-1.905) 6(2.45,-0.635) 7(2.45,0.635) 8(2.45,1.905)
  silkscreen extent -2.58,-2.5 0.8,2.93, body extent -2,-2.5 2,2.5, height 1.75
SWITCH [mm]
  rect 2x1.3 smd: 1(1.75,0) 2(-1.75,0) 3(0,3.9)
  silkscreen extent -4.6,-2.5 4.6,5.92
TANT_33UF [mm] "Tantalum"
  rect 1x2.2 smd: 1(-1.25,0) 2(1.25,0)
  Top Layer lines w0.254: -2.248,1.768 -1.518,1.768 ccw(c-1.518,1.779) -1.508,1.779
  silkscreen extent -3.15,-2.5 3.15,2.5
TI-D8_N [mm] "SOIC, 8-Leads, Body 4.9x3.9mm, Pitch 1.27mm, IPC Medium Density"
  oval 2.2x0.6 smd: 1(-2.4,1.905) 2(-2.4,0.635) 3(-2.4,-0.635) 4(-2.4,-1.905) 5(2.4,-1.905) 6(2.4,-0.635) 7(2.4,0.635) 8(2.4,1.905)
  silkscreen extent -2.52,-2.5 0.9,2.88, body extent -2,-2.5 2,2.5, height 1.75

## Part data
C1: "TX3B336K016C1000 Aluminum", Supplier Part Number 1=74-TX3B336K016C1000, Supplier 1=Mouser
C2 C3 C4 C20 C29 C51 C60: library part CMP-2007-04598-2, "Automotive Ceramic Capacitor, 0805, 1uF, 10%, X7R, 15%, 25V KAF21KR71E105KU", Capacitance=1uF, Case Code (Imperial)=0805, Case Code (Metric)=2012, Dielectric=X7R, Max Operating Temperature=125°C, Min Operating Temperature=-55°C, Package Quantity=2000, Ratings=AEC-Q200, Tolerance=10%, Voltage Rating=25V, Case/Package=0805, ComponentLink1Description="New link", ComponentLink1URL=https://www.mouser.com/ProductDetail/KYOCERA-AVX/KAF21KR71E105KU?qs=sGAEpiMZZMuMW9TJLBQkXqLYvz3DzaXfb92J4aJdY3Y%3D>, Construction=Flat, Depth=1.25mm, Features="Soft Termination", Height=1.4mm, Lead Free="Lead Free", Length=2.01mm, Mount="Surface Mount", Number of Pins=2, Packaging="Tape and Reel", Radiation Hardening=No, REACH SVHC="No SVHC", RoHS Compliant=Yes, Series=FLEXITERM®, Termination=SMD/SMT, Thickness=0.055inch, Voltage Rating (DC)=25V, Width=0.049inch
C5: "KAM32LL81H475KU - ceramic", Supplier Part Number 1=581-KAM32LL81H475KU, Supplier 1=Mouser
C6: library part KAF31GR71C106KU, "Capacitor KAF31GR71C106KU", Manufacturer_Name="Kyocera AVX", Mouser Part Number=581-KAF31GR71C106KU, Datasheet Link=https://www.mouser.com/datasheet/2/40/AutoMLCCKAF-3218225.pdf, Height=0.94mm, Manufacturer_Part_Number=KAF31GR71C106KU, Mouser Price/Stock=https://www.mouser.co.uk/ProductDetail/KYOCERA-AVX/KAF31GR71C106KU?qs=Jm2GQyTW%2Fbhim4Xv0xbSNg%3D%3D
C7 C17 C27 C33 C37 C42 C58 C64 C68: library part 293D106X9010C2TE3, "Capacitor Polarised 293D106X9010C2TE3", Manufacturer_Name=Vishay, Mouser Part Number=74-293D106X9010C2TE3, Arrow Part Number=293D106X9010C2TE3, Arrow Price/Stock=https://www.arrow.com/en/products/293d106x9010c2te3/vishay, Datasheet Link=http://www.vishay.com/docs/40002/293d.pdf, Height=2.8mm, Manufacturer_Part_Number=293D106X9010C2TE3, Mouser Price/Stock=https://www.mouser.co.uk/ProductDetail/Vishay-Sprague/293D106X9010C2TE3?qs=Fp01vWGAG3pfp%2FN4ElsWcw%3D%3D
C8: library part VZL101M1VTR-0607, "Capacitor Polarised VZL101M1VTR-0607", Manufacturer_Name=Lelon, Mouser Part Number=140-VZL101M1VTR-0607, Datasheet Link=http://www.mouser.com/ds/2/231/151002386372-1222327.pdf, Height=10.5mm, Manufacturer_Part_Number=VZL101M1VTR-0607, Mouser Price/Stock=https://www.mouser.co.uk/ProductDetail/Lelon/VZL101M1VTR-0607?qs=AQlKX63v8RtivTm9cgLqgQ%3D%3D
C9: library part CMP-2007-04594-1, "08052C102K4Z2A", Manufacturer="AVX Interconnect / Elco", Part Number=08052C102K4Z2A
C10 C11 C12 C13 C14 C15 C28 C30 C34 C36 C38 C40 C43 C44 C45 C46 C47 C49 C59 C61 C65 C67 C69 C71: library part CMP-2006-02356-1, Manufacturer=Murata, Part Number=GCM188R71C104KA37J
C16: library part EDH227M035A9MAA, "Capacitor Polarised EDH227M035A9MAA", Manufacturer_Name=KEMET, Datasheet Link=https://content.kemet.com/datasheets/KEM_A4049_EDH.pdf, Height=10.5mm, Manufacturer_Part_Number=EDH227M035A9MAA
C18 C19 C23 C26 C35 C48 C50 C54 C57 C66: library part CMP-2006-02356-1, "GCM188R71C104KA37J", Manufacturer=Murata, Part Number=GCM188R71C104KA37J
C21 C22 C24 C25 C31 C32 C39 C41 C52 C53 C55 C56 C62 C63 C70 C72: "08053A202JAT2A", Supplier Part Number 1=581-08053A202JAT2A, Supplier 1=Mouser
D1: library part CMP-1055-00016-1, "Rectifier, 2-Pin Axial_Lead, Pb-Free, Tape and Reel", Manufacturer="On Semiconductor", ComponentLink1Description="Manufacturer URL", ComponentLink1URL=http://www.onsemi.com/, ComponentLink2Description=Datasheet, ComponentLink2URL=http://www.onsemi.cn/pub_link/Collateral/MBR350-D.PDF, ComponentLink3Description="Package Specification", ComponentLink3URL=http://www.onsemi.com/pub_link/Collateral/267-05.PDF, Configuration=Single, DatasheetVersion="Rev. 6", IFSM Max (A)=80, Mounting Technology="Through Hole", PackageDescription="2-Pin, Axial Lead, Diameter 5.05 mm", PackageReference=AXIAL_LEAD-2-267-05, PackageVersion="Rev. G, 06/2000", Packing="Tape and Reel", PartNumber=MBR360RLG, RoHS=TRUE
J1 J3 J4 J5 J6 J7 J9 J10 J11 J12 J13: library part CMP-2000-05815-1, "PCB Terminal Block, 13.5 A, 400 V, 2-Pin THD, RoHS, Bulk", Current Rating=13500mA, Manufacturer="Phoenix Contact", Package Description="2-Pin Through Hole Device, Body 8.1 x 10.16 mm, Pitch 5.08 mm", Package Reference=1729128-2, Package Version=03/2015, PartNumber=1729128, Voltage Rating=400V, Datasheet URL=https://datasheet.ciiva.com/16046/1729128-16046181.pdf, Datasheet Version=12/2013, Manufacturer URL=http://www.phoenixcontact.com/, Mounting Technology=ThroughHole, No. of Positions=2, No. of Rows=1, Orientation=Horizontal, Package URL=https://www.phoenixcontact.com/online/portal/pi/pxc/product_detail_page/!ut/p/b1/3VdJjqNKFDxLH8AFycySyWY2ozFsEPOMMQaDOX1XedGL_1Vdm5YXJleknhSKeBkvI6EA8ncAo3AYoDhBQGco6KN7VURTdemj9us_IEKEZo_YHiPAEWEFmDGOHMORkqKYCORBZxgL7ZoaZYcbFFUZ3fqxSY6GOuxydWUuHqz1ynmMFygu583Bob0Ewr6Sd_l-5m-kAueHiB0jpRwZwe58wwtkpxtMYd_LmGcDRU02dRNEyWt6Y2ti5pSyJ_reIkzIulrqApdnbT11V5jnCKbYNCvhEM1MCpPByat_X379-iThf08CI5GfOPqfBeS3BRoBOdD55AKVv0iLwCMq-2BrzXWSGRH7pUGD9uwXQjiph3xL0DKQwdGa0JImiIOmBNOestqgwTHSSs2oOep-78apyXQBvNi8ZLaFjvjWvcaUEBu0MC6Wbe-d6mB0FAebo2lUWinqYaZs5DAYzV0RP9yitUjnGJ0iI9xhZkT42OCQNUJJhkgWINNQLP2JFP6OpMg3JCVg70jqHT0lvKOnhHf0lPuOnnLf0VPuWx6_dxwUIvwk5WMkT0kLL1mh61l2yZVSzG3pYV_bqo-mj6uMKwKwdnnW8Jh5RTOJzMOA5c-eJDaZQw4mTMPH02PvS_ZAqNVjVTo2WyYLkwH_KU1mmmG5kjRhDqPXLwwVHvVOjCM60-fpXvTDfMGW1PVFVS1r4e4yVDk4ZdNbkUHvqPqQSeian4UD39fNKmachqdJ1NJbyk8rXT9mXTvPk3oE5meulKGgiruPJek-4I9hTT6G8ZLOyRSm2RRVbThERQad5OS28hdt4YW4vG0stgYYzsWsK4_7y6DZMjJSCqri1kyiZR5vD7pwIrNR7QwPHTcLTI5qT7eRlpHrdGiupYlqQDJ7zy_CND8fWWBoLRXxk1RVcXiBQwbTD4Xi7KL-FuO94t9xaqweXzH, Packing=Bulk, Pitch=5.08mm, RoHS=TRUE
L1: library part CMP-14484-000176-1, "SMD Inductors 330uH ±10% 0.09A 15.99Ω 1007 CBC2518T331K", Case Code (Imperial)=1007, Case Code (Metric)=2518, Current Rating=90mA, DC Resistance (DCR)=15.99R, Inductance=330uH, Inductance Tolerance=10%, Max Operating Temperature=105°C, Min Operating Temperature=-40°C, Package Quantity=2000, Resistor Type=Wirewound, Saturation Current=100mA, Self Resonant Frequency=4.5MHz, Test Frequency=796kHz, Case/Package=1007, Core Material=Ferrite, Depth=2mm, Halogen Free="Halogen Free", Height=1.8mm, Height - Seated (Max)=0.079inch, Lead Free="Lead Free", Length=0.098inch, Max DC Current=90mA, Mount="Surface Mount", Packaging="Tape and Reel", Radiation Hardening=No, RoHS Compliant=Yes, Series=CB, Shielding=Unshielded, Termination=SMD/SMT, Tolerance=10%, Width=0.071inch
R1 R2 R6 R12 R14 R22 R30 R32 R33 R38 R42 R48 R50 R58 R66 R68 R69 R74: "ERA-3AED472V", Supplier Part Number 1=667-ERA-3AED472V, Supplier 1=Mouser
R3: "RQ73C1J100KBTD", Supplier Part Number 1=97AC0504, Supplier 1=Avnet
R4: "ERA-3ARW432V", Supplier Part Number 1=667-ERA-3ARW432V, Supplier 1=Mouser
R5: "ERA-3ARB562V", Supplier Part Number 1=667-ERA-3ARB562V, Supplier 1=Mouser
R7 R8 R10 R13 R15 R17 R20 R21 R23 R26 R27 R28 R31 R35 R37 R39 R41 R43 R44 R46 R49 R51 R53 R56 R57 R59 R62 R63 R64 R67 R71 R73 R75 R77: "Thin Film Resistors - SMD RQ 0603 1K0 0.1% 10PPM 5K RL RQ73C1J1K0BTD", Supplier Part Number 1=5134876, Supplier 1="Future Electronics"
R9 R11 R18 R19 R24 R25 R29 R36 R40 R45 R47 R54 R55 R60 R61 R65 R72 R76: "ERA-2VRB1002X", Supplier Part Number 1=667-ERA-2VRB1002X, Supplier 1=Mouser
R16 R34 R52 R70: library part CMP-2000-03062-2, "RES Thick Film, 200Ω, 1%, 0.1W, 100ppm/°C, 0603 CRCW0603200RFKEA", Case Code (Imperial)=0603, Case Code (Metric)=1608, Max Operating Temperature=155°C, Min Operating Temperature=-55°C, Package Quantity=5000, Power Rating=100mW, Resistance=200R, Temperature Coefficient=100ppm/°C, Tolerance=1%, Voltage Rating=75V, Case/Package=0603, Composition="Thick Film", Contact Plating=Tin, Depth=0.85mm, Height=0.45mm, Lead Free="Lead Free", Length=1.55mm, Military Standard=Not, Number of Pins=2, Packaging="Tape and Reel", Termination=SMD/SMT, Voltage Rating (DC)=75V, Weight=7.1E-05oz, Width=0.85mm
U1: library part CMP-0136-00244-1, "500 mA, Low Voltage, Low Quiescent Current LDO Regulator, 8-Pin SOIC 150mil, Extended Temperature", Code_IPC=SOIC127P600-8, Code_JEDEC=MS-012, DatasheetVersion="revB, Dec-2007", PackageDescription="8-Lead Plastic Small Outline (SN) - Narrow, 3.90mm Body [SOIC]", PackageReference=SOIC-SN8, PackageVersion="revBB, Aug-2009"
U2: library part CMP-0367-00041-2, "Low Noise, Very Low Drift, Precision Voltage Reference, -40 to 125 degC, 8-pin SOIC (D), Green (RoHS & no Sb/Br)", Manufacturer="Texas Instruments", Rating=Military, Temp Coeff(Max)(ppm/ degree C)=3, Code_JEDEC=MS-012, ComponentLink1Description="Manufacturer URL", ComponentLink1URL=http://www.ti.com/, ComponentLink2Description=Datasheet, ComponentLink2URL=http://www.ti.com/general/docs/lit/getliterature.tsp?genericPartNumber=REF5025&fileType=pdf, ComponentLink3Description="Package Specification", ComponentLink3URL=http://www.ti.com/litv/pdf/msoi002j, DatasheetVersion=SBOS410E, Eco-Plan="Green (RoHS & no Sb/Br)", Initial Accuracy @ 25/deg C(%)=0.05, Iout/Iz(Max)(mA)=10, Iq(Max)(uA)=1000, Mounting Technology="Surface Mount", PackageDescription="8-Pin Plastic Small Outline, Body 4.9 x 3.9 mm, Pitch 1.27 mm", PackageReference=D0008A, PackageVersion=4040047-3/M, PartNumber=REF5025AIDR, SubFamily="Series Voltage Reference", VI(Max)(V)=18, VI(Min)(V)=2.7, VO(V)=2.5
U3: library part CMP-00252-66660348-1, "LM2575-5.0WU BUCK, 40VIN, 52KHZ, 1A, 5V, 5TO263; Primary Input Voltage: 40V; No. of Outputs: 1;", Case/Package=TO-263-6, Max Input Voltage=40V, Max Junction Temperature (Tj)=125°C, Max Operating Temperature=85°C, Max Output Current=1A, Min Input Voltage=4V, Min Operating Temperature=-40°C, Min Output Voltage=5V, Nominal Supply Current=5mA, Switching Frequency=52kHz, Efficiency=82%, Height=4.59mm, Lead Free="Lead Free", Length=10.67mm, Lifecycle Status=Production, Max Duty Cycle=98%, Max Supply Voltage=40V, Min Supply Voltage=4V, Mount="Surface Mount", NexarPartId=66660348, Nominal Output Voltage=5V, Number of Channels=1, Number of Outputs=1, Number of Pins=5, Output Configuration=Positive, Output Current=1A, Output Type=Fixed, Output Voltage=5V, Packaging="Cut Tape", REACH SVHC="No SVHC", RoHS=Compliant, Synchronous Rectifier=No, Width=9.17mm
U4: library part CMP-00370-110297362-1, "TPS7B8633QDDARQ1 Automotive 500-mA, 40-V, ultra-low-IQ, low-dropout (LDO) linear regulator with power good", Manufacturer Lifecycle Status=ACTIVE, Height=1.7mm, Length=4.89mm, Lifecycle Status=Production, NexarPartId=110297362, Number of Pins=8, Thickness=1.48mm, Width=3.9mm
U5: library part CMP-0272-01099-3, "1 uA, Rail-to-Rail, CMOS Operational Amplifier, 1.8 to 5.5 V, 0 to 85 degC, 5-pin SOT23 (DCK5), Green (RoHS & no Sb/Br)", Manufacturer="Texas Instruments", Rating=Catalog, Total Supply Voltage(Max)(+5V is 5, +/-5V is 10)=5.5, Total Supply Voltage(Min)(+5V is 5, +/-5V is 10)=1.8, CMRR(Min)(dB)=48, Code_JEDEC=MO-203, ComponentLink1Description="Manufacturer URL", ComponentLink1URL=http://www.ti.com/, ComponentLink2Description=Datasheet, ComponentLink2URL=http://www.ti.com/lit/ds/symlink/opa349.pdf, ComponentLink3Description="Package Specification", ComponentLink3URL=http://www.ti.com/litv/pdf/mpds025f, DatasheetVersion=SBOS121B, Eco-Plan="Green (RoHS & no Sb/Br)", GBW(Typ)(MHz)=0.07, IIB(Max)(pA)=10, Iq per channel(Max)(mA)=0.002, Mounting Technology="Surface Mount", Number of Channels=1, Offset Drift(Typ)(uV/C)=15, PackageDescription="5-Pin Plastic Small Outline, Body 2 x 1.25 mm, Pitch 0.65 mm", PackageReference=DCK0005A, PackageVersion="4093553-3/G, 01/2007", Packing="LARGE T&R", PartNumber=OPA349SA/3K, Slew Rate(Typ)(V/us)=0.02, Sub Family="Low Input Bias Current Amp (<=10pA), Low Power Amp (<=500uA), Low Supply Voltage Amplifier (<=2.7V), Precision Amplifier", Vio (25C)(Max)(mV)=10
U6 U9 U12 U14 U17 U20 U24 U27 U30 U32 U35 U38: library part CMP-0272-01093-3, "Low-Cost, Low Noise, 5.5 MHz CMOS Operational Amplifier, 2.2 to 5.5 V, -40 to 125 degC, 5-pin SOT23 (DCK5), Green (RoHS & no Sb/Br)", Manufacturer="Texas Instruments", Total Supply Voltage(Max)(+5V is 5, +/-5V is 10)=5.5, Total Supply Voltage(Min)(+5V is 5, +/-5V is 10)=2.2, CMRR(Min)(dB)=70, Code_JEDEC=MO-203, ComponentLink1Description="Manufacturer URL", ComponentLink1URL=http://www.ti.com/, ComponentLink2Description=Datasheet, ComponentLink2URL=http://www.ti.com/general/docs/lit/getliterature.tsp?genericPartNumber=OPA377&fileType=pdf, ComponentLink3Description="Package Specification", ComponentLink3URL=http://www.ti.com/litv/pdf/mpds025f, DatasheetVersion=SBOS504B, Eco-Plan="Green (RoHS & no Sb/Br)", IIB(Max)(pA)=10, Iq per channel(Max)(mA)=1.05, Mounting Technology="Surface Mount", Number of Channels=1, Offset Drift(Typ)(uV/C)=0.32, PackageDescription="5-Pin Plastic Small Outline, Body 2 x 1.25 mm, Pitch 0.65 mm", PackageReference=DCK0005A, PackageVersion="4093553-3/G, 01/2007", PartNumber=OPA377AIDCKR, Slew Rate(Typ)(V/us)=2, Sub Family="Low Input Bias Current Amp (<=10pA), Low Noise Amp (<=10nV/rtHz), Low Supply Voltage Amplifier (<=2.7V), Precision Amplifier", Vio (25C)(Max)(mV)=1, Vn at 1kHz(Typ)(nV/rtHz)=7.5
U7 U16 U25 U34: "Analog to Digital Converters - ADC 16-bit, 1 Msps, single channel, differential SAR ADC", ComponentLink1Description="New link", ComponentLink1URL=https://www.mouser.com/datasheet/2/268/MCP33131D_Data_Sheet_DS20005947B-3443995.pdf
U8 U13 U15 U21 U26 U31 U33 U39: "Differential Amplifiers Single, Fully Differential Amplifier, E Temp", ComponentLink1Description="New link", ComponentLink1URL=https://www.mouser.com/datasheet/2/268/MCP6D11_Data_Sheet_DS20006162A-3443772.pdf
U10 U28: library part CMP-06276-000703-1, "IC MCU 32BIT 2MB FLASH 64TQFP", Case/Package=TQFP, Frequency=200MHz, Max Operating Temperature=85°C, Min Operating Temperature=-40°C, Interface=I2C, Memory Size=2MB, Memory Type=FLASH, Mount="Surface Mount", Number of I/Os=46, Oscillator Type=Internal, Packaging=Tray, Peripherals="Brown-out Detect/Reset", RoHS Compliant=Yes, Series="PIC® 32MZ"
U18 U22 U36 U40: library part CMP-0004-00142-1, "16-Bit, Ultra-Low Power, Voltage Output Digital to Analog Converter, -40 to 85 degC, 8-pin SOIC (D8), Green (RoHS & no Sb/Br)", Manufacturer="Texas Instruments", Power Consumption(Typ)(mW)=0.015, Code_JEDEC=MS-012, ComponentLink1Description="Manufacturer URL", ComponentLink1URL=http://www.ti.com/, ComponentLink2Description=Datasheet, ComponentLink2URL=http://www.ti.com/general/docs/lit/getliterature.tsp?genericPartNumber=DAC8830&fileType=pdf, ComponentLink3Description="Package Specification", ComponentLink3URL=http://www.ti.com/litv/pdf/msoi002j, DAC Channels=1, DatasheetVersion=SLAS449D, DNL(Max)(+/-LSB)=1, Eco-Plan="Green (RoHS & no Sb/Br)", INL(Max)(+/-LSB)=1, Interface="Serial SPI", Mounting Technology="Surface Mount", PackageDescription="8-Pin Plastic Small Outline, Body 4.9 x 3.9 mm, Pitch 1.27 mm", PackageReference=D8, PackageVersion="4040047-3/M, 06/2011", PartNumber=DAC8830ICD, Resolution(Bits)=16, Settling Time(us)=1, SubFamily="Precision DAC (=<10MSPS)"
U19 U23 U37 U41: library part CMP-0272-03251-3, "CMOS, Rail-to-Rail I/O, Operational Amplifier, 4 to 12 V, -40 to 85 degC, 8-pin SOIC (D8), Green (RoHS & no Sb/Br)", Manufacturer="Texas Instruments", Rating=Catalog, Total Supply Voltage(Max)(+5V is 5, +/-5V is 10)=12, Total Supply Voltage(Min)(+5V is 5, +/-5V is 10)=4, CMRR(Min)(dB)=70, Code_JEDEC=MS-012, ComponentLink1Description="Manufacturer URL", ComponentLink1URL=http://www.ti.com/, ComponentLink2Description=Datasheet, ComponentLink2URL=http://www.ti.com/lit/ds/symlink/opa704.pdf, ComponentLink3Description="Package Specification", ComponentLink3URL=http://www.ti.com/litv/pdf/msoi002j, DatasheetVersion=SBOS180A, Eco-Plan="Green (RoHS & no Sb/Br)", GBW(Typ)(MHz)=3, IIB(Max)(pA)=10, Iq per channel(Max)(mA)=0.2, Mounting Technology="Surface Mount", Number of Channels=1, Offset Drift(Typ)(uV/C)=4, PackageDescription="8-Pin Plastic Small Outline, Body 4.9 x 3.9 mm, Pitch 1.27 mm", PackageReference=D0008A, PackageVersion="4040047-3/M, 06/2011", Packing=TUBE, PartNumber=OPA704UA, Slew Rate(Typ)(V/us)=3, Sub Family="Low Input Bias Current Amp (<=10pA), Low Power Amp (<=500uA), Precision Amplifier", Vio (25C)(Max)(mV)=0.75

## Via types
v1: diameter 0.8, hole 0.3, Top Layer to Bottom Layer, 291 vias
v2: diameter 1.5, hole 0.5, Top Layer to Bottom Layer, 48 vias
v3: diameter 0.5, hole 0.3, Top Layer to Bottom Layer, 8 vias
v4: diameter 1.27, hole 0.711, Top Layer to Bottom Layer, 4 vias
v5: diameter 0.83, hole 0.3, Top Layer to Bottom Layer, 1 vias